# Altium PCB FILLER_PCB.PcbDoc
Units mm, origin at the board's own origin, x right, y up, seen from the top; angles counter-clockwise.
Board outline 71.25 x 41.25 mm, 2 copper layers (Top Layer, Bottom Layer); 48 components, 48 nets, 198 pads, 15 vias.
Unrouted connection lines stored in the file: 64.
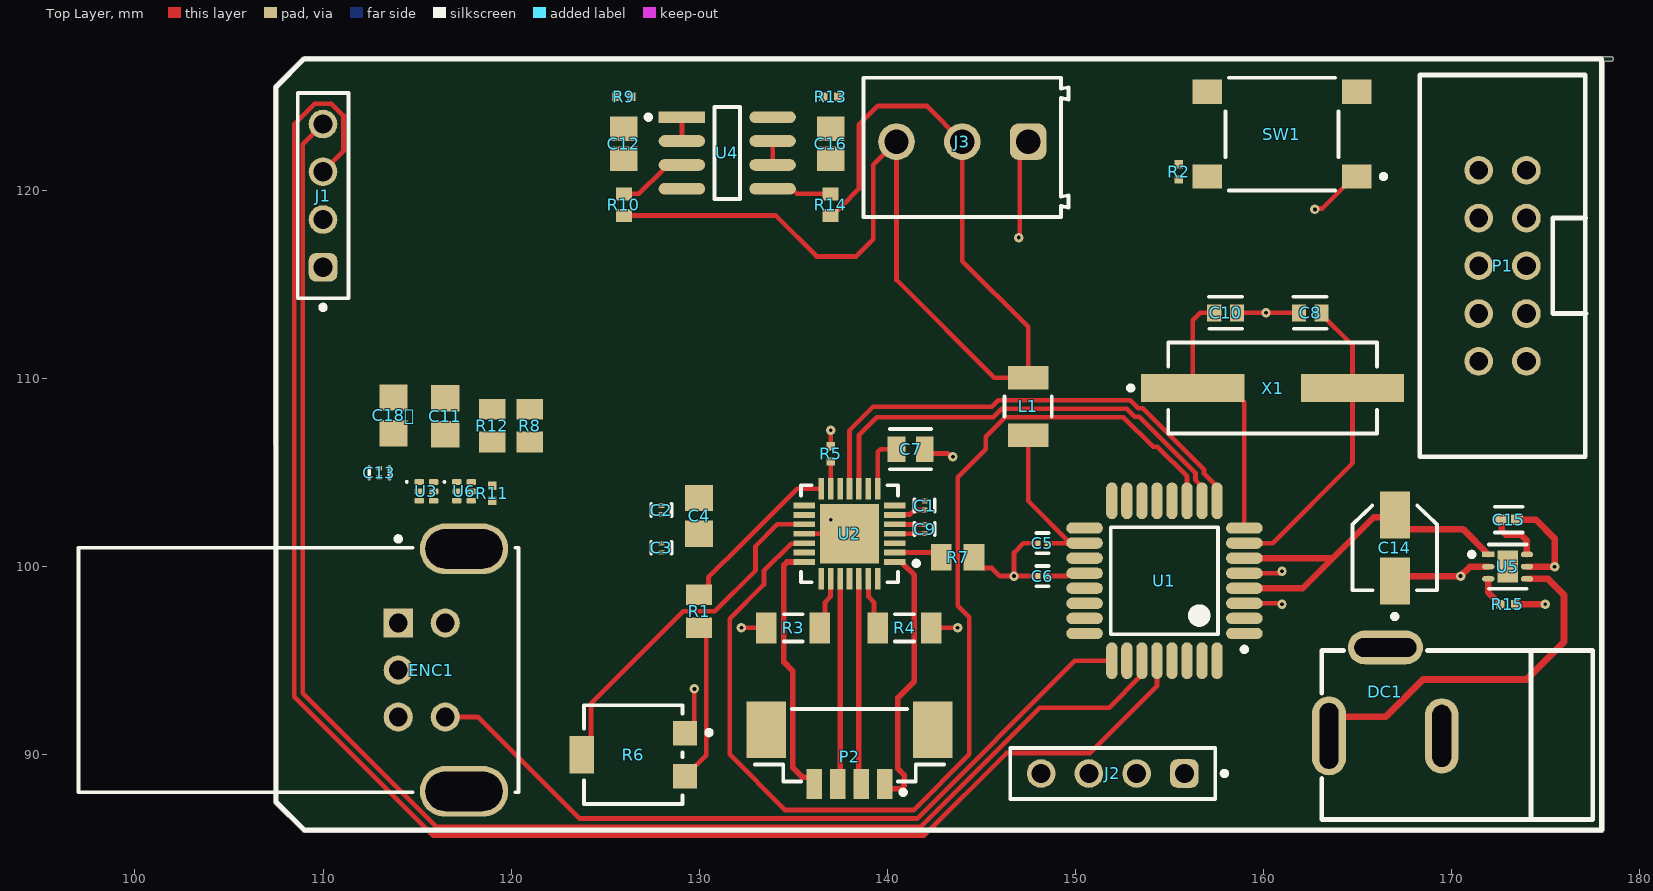
[diagram p0: Top Layer view]
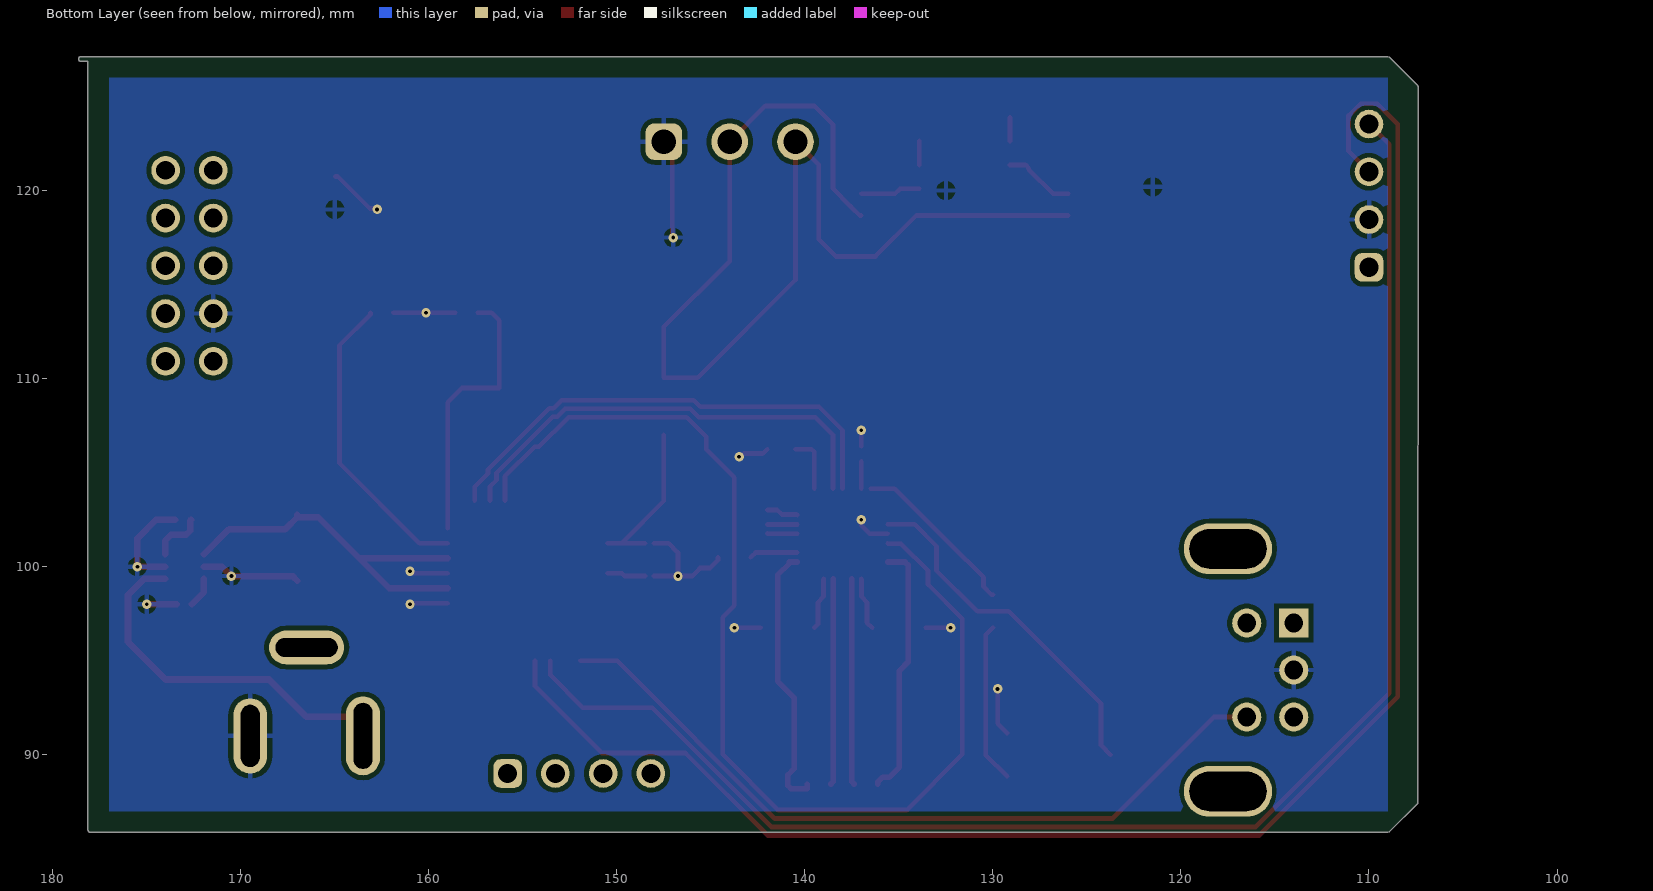
[diagram p1: Bottom Layer view, seen from below]

## Layer stack, top to bottom
Top Solder: solder mask 0.0102, Solder Resist, Dk 3.5
Top Layer: signal copper 0.0356
Dielectric 1: dielectric 0.32, FR-4, Dk 4.8
Bottom Layer: signal copper 0.0356
Bottom Solder: solder mask 0.0102, Solder Resist, Dk 3.5

## Board outline
107.41,87.41 108.91,85.91 109,85.873 178,85.873 ccw(c178,86) 178.127,86 178.127,126.873 178.5,126.873 ccw(c178.5,127) 178.627,127 ccw(c178.5,127) 178.5,127.127 109,127.127 108.91,127.09 107.41,125.59 107.373,125.5

## Design rules (kind name [scope] priority, off if disabled: settings)
Clearance [All] p1: gap=0.25 ignorepadtopadclearanceinfootprint=TRUE except(0: Arc-Hole Track-Hole SMDPad-Hole THPad-Hole Via-Hole Fill-Hole Poly-Hole Region-Hole Text-Hole; 0.2: Arc-Arc Arc-Track Arc-SMDPad Arc-THPad Track-Track Track-SMDPad Track-THPad)
PolygonConnect [All] p1: connectstyle=Relief reliefconductorwidth=0.254 reliefentries=4 polygonreliefangle="90 Angle" airgapwidth=0.254
RoutingVias [All] p1: holewidth=0.2 width=0.5 viastyle="Through Hole" minholewidth=0.2 minwidth=0.5 maxholewidth=0.3 maxwidth=0.7
SolderMaskExpansion [All] p1: expansion=0.102 istentingtop=FALSE
Width [All] p1: maxlimit=1 minlimit=0.25 preferedwidth=0.25 minimp=50.000000 maximp=50.000000 favimp=50.000000
30 further rules are at their usual default settings.

## Components (designator, comment, footprint, x,y, rotation, side; value= is the part's Value field where it differs from the comment)
C1 "0.1uF" FP-GRM033-0_03-MFG 142,103.25 r90 top
C2 "0.1uF" FP-GRM033-0_03-MFG 128,103.012 r90 top
C3 "0.1uF" FP-GRM033-0_03-MFG 128,101 r270 top
C4 "4.7uF" CAPC2013X135X45LL10T25 130,102.7 r270 top
C5 "0.1uF" FP-GRM033-0_03-MFG 148.263,101.25 r180 top
C6 "0.1uF" FP-GRM033-0_03-MFG 148.263,99.5 r180 top
C7 "0.22 uF" FP-C0805C-DN-MFG 141.25,106.25 r180 top value="0.22 μF"
C8 "22pF" FP-C0603C-CF-MFG 162.5,113.5 r180 top value="22 pF"
C9 "0.1uF" FP-GRM033-0_03-MFG 142,102 r90 top
C10 "22pF" FP-C0603C-CF-MFG 158,113.5 r0 top value="22 pF"
C11 "4.7uF" CAPC2013X135X45LL10T25 116.5,108 r90 top
C12 "0.33uF" CAPC2013X140X50NL20T25 126,122.5 r270 top
C13 "0.1uF" FP-GRM033-0_03-MFG 113,105 r90 top
C14 "10uF" FP-FKB-MFG 167,101 r90 top
C15 "1uF" FP-GRM155-0_05-IPC_B 173.071,102.5 r0 top
C16 "0.33uF" CAPC2013X140X50NL20T25 137,122.5 r270 top
C18 "4.7uF" CAPC2013X135X45LL10T25 113.75,108.05 r270 top (schematic designator C18)
DC1 "DC-005-5A-2.5" DC-IN-TH_DC-005-5A-2.5 251.442,90.241 r180 top
ENC1 "PEC12R-2120F-S0012" FP-PEC12R-2120F-S0012-MFG 108.7,94.5 r270 top
J1 "61300411821" 61300411821 110,119.73 r90 top
J2 "61300411821" 61300411821 152,89 r180 top
J3 "691214110003" 691214110003 144,122.3 r180 top
L1 "10uH" BOUR-CM322522_V 147.5,108.525 r270 top
P1 "HDR-IDC-2.54-2X5P" HDR-IDC-2.54-2X5P 172.912,71.052 r90 top
P2 "653104124022" 653104124022 138,90.5 r180 top
R1 "100k Ohm" RESC2013X55X40NL15T20 130,97.625 r270 top
R2 "10k Ohm" RESC1005X40X25LL05T05 155.5,121 r90 top
R3 "0.068 Ohm" RESC3216X70X50NL05T20 135,96.75 r180 top
R4 "0.068 Ohm" RESC3216X70X50NL05T20 140.925,96.75 r0 top
R5 "10k Ohm" RESC1005X40X25LL05T05 137,106 r90 top
R6 "10k Ohm" FP-TS53YL-MFG 126.5,90 r90 top
R7 "100k Ohm" RESC2013X55X40NL15T20 143.75,100.5 r180 top
R8 "100k" RESC2013X55X40NL15T20 121,107.5 r90 top
R9 "10k Ohm" RESC1005X40X25LL05T05 126,125 r0 top
R10 "2.4 M Ohm" RESC1609X50X30LL10T20 126,119.25 r270 top
R11 "10k Ohm" RESC1005X40X25LL05T05 119,103.9 r270 top
R12 "100k" RESC2013X55X40NL15T20 119,107.5 r270 top
R13 "10k Ohm" RESC1005X40X25LL05T05 137,125 r0 top
R14 "2.4 M Ohm" RESC1609X50X30LL10T20 137,119.25 r270 top
R15 "10k Ohm" RESC1005X40X25LL05T05 173,98 r0 top
SW1 "" FP-PTS645SM43SMTR92LFS-MFG 161,123 r180 top
U1 "ATmega328P-AU" 32A_M 154.75,99.25 r180 top
U2 "A4988SETTR-T" FP-ET-28-MFG 138,101.75 r180 top
U3 "SCHMITT" DRY0006A_V 115.5,104 r0 top
U4 "TLV9152IDR" FP-D0008A-IPC_A 131.5,122 r0 top
U5 "TPS7A2650DRVR" FP-DRV0006A-IPC_B 173,100 r0 top
U6 "SN74LVC2G17DRYR" DRY0006A_V 117.5,104 r0 top
X1 "CRYSTAL" CTS-ATS-SM-XTAL-2 160.5,109.5 r0 top

## Footprints (in the part's own frame and the unit in brackets; to place one, negate y for a bottom-side part, rotate by r counter-clockwise, add the part's x,y. Pads: shape width x height; smd on the part's side, far side on the other; paste and mask are expansions set on the pad)
32A_M [mm] "Thin QFP, 32-Leads, Body 7x7mm, Pitch 0.8mm, IPC Low Density"
  oval 1.95x0.6 smd: 1(-4.25,2.8) 2(-4.25,2) 3(-4.25,1.2) 4(-4.25,0.4) 5(-4.25,-0.4) 6(-4.25,-1.2) 7(-4.25,-2) 8(-4.25,-2.8) 17(4.25,-2.8) 18(4.25,-2) 19(4.25,-1.2) 20(4.25,-0.4) 21(4.25,0.4) 22(4.25,1.2) 23(4.25,2) 24(4.25,2.8)
  oval 0.6x1.95 smd: 9(-2.8,-4.25) 10(-2,-4.25) 11(-1.2,-4.25) 12(-0.4,-4.25) 13(0.4,-4.25) 14(1.2,-4.25) 15(2,-4.25) 16(2.8,-4.25) 25(2.8,4.25) 26(2,4.25) 27(1.2,4.25) 28(0.4,4.25) 29(-0.4,4.25) 30(-1.2,4.25) 31(-2,4.25) 32(-2.8,4.25)
  silkscreen extent -4.38,-2.85 2.85,3.77, body extent -3.5,-3.5 3.5,3.5, height 1.2
61300411821 [mm] "Socket Header, Pitch 2.54 mm, THT, Vertical, single row, 4p"
  rrect50% 1.52x1.52 hole 1.02: 1(-3.81,0)
  round 1.52 hole 1.02: 2(-1.27,0) 3(1.27,0) 4(3.81,0)
  silkscreen extent -6.06,-1.35 5.46,1.35, body extent -5.33,-1.25 5.33,1.25, height 8.55
653104124022 [mm] "1.25mm SMT Male Vertical Shrouded Header, 4p"
  rect 0.81x1.6 smd: 1(-1.875,2.07) 2(-0.625,2.07) 3(0.625,2.07) 4(1.875,2.07)
  rect 2.1x3 smd: MP1(-4.425,-0.83) MP2(4.425,-0.83)
  silkscreen extent -5.02,-1.92 5.02,2.62, body extent -4.97,-1.85 4.97,2.35, height 4.74
691214110003 [mm] "3.50 mm Horizontal Entry Modular, 3p"
  rrect50% 1.95x1.95 hole 1.3: 1(-3.5,-0.3)
  round 1.95 hole 1.3: 2(0,-0.3) 3(3.5,-0.3)
  silkscreen extent -5.65,-3.7 5.25,3.7, body extent -5.7,-3.7 5.25,3.7, height 8.55
BOUR-CM322522_V [mm] "Inductor, 2-Leads, Body 3.2x2.5mm, Pitch 3.05mm"
  rect 1.25x2.15 smd: 1(-1.525,0) 2(1.525,0)
  silkscreen extent -0.54,-1.25 0.54,1.25, body extent -1.77,-1.35 1.77,1.35, height 2.4
CAPC2013X135X45LL10T25 [mm] "Chip Capacitor, 2-Leads, Body 2.10x1.35mm, IPC High Density"
  rect 1.4x1.5 smd: 1(-0.95,0) 2(0.95,0)
  body extent -1.05,-0.67 1.05,0.67, height 1.35
CAPC2013X140X50NL20T25 [mm] "Chip Capacitor, 2-Leads, Body 2.00x1.25mm, IPC Medium Density"
  rect 1.3x1.45 smd: 1(-0.8,0) 2(0.8,0)
  body extent -1.1,-0.72 1.1,0.72, height 1.4
CTS-ATS-SM-XTAL-2 [mm] "SMD, 2-Leads, Body 11.1x4.83mm, Pitch 8.5mm"
  rect 5.5x1.5 smd: 1(-4.25,0) 2(4.25,0)
  silkscreen extent -7.67,-2.41 5.55,2.41, body extent -5.59,-2.42 5.59,2.42, height 4.3
DC-IN-TH_DC-005-5A-2.5 [mm]
  oval 1.8x4.2 hole 1 slot 3.5 at 90 deg paste-2539.97 mask+0.051: 1(87.942,-0.759)
  oval 1.8x4 hole 1 slot 3.3 at 90 deg paste-2539.97 mask+0.051: 2(81.942,-0.759)
  oval 4x1.8 hole 1 slot 3.3 at 0 deg paste-2539.97 mask+0.051: 3(84.942,-5.462)
  silkscreen extent 73.91,-5.31 88.32,3.69
DRY0006A_V [mm] "SON, 6-Leads, Body 1.45x1mm, Pitch 0.5mm"
  rrect33% 0.52x0.3 smd paste+0 mask+0.102: 1(-0.385,0.5)
  rrect33% 0.49x0.3 smd paste+0 mask+0.102: 2(-0.385,0) 3(-0.385,-0.5) 4(0.385,-0.5) 5(0.385,0) 6(0.385,0.5)
  silkscreen extent -1.09,0.46 -0.99,0.56, body extent -0.5,-0.72 0.5,0.72, height 0.6
FP-C0603C-CF-MFG [mm]
  rect 0.75x0.9 smd paste+0 mask+0: 1(-0.6,0) 2(0.6,0)
  silkscreen extent -0.87,-0.85 0.88,0.85, body extent -1.2,-0.6 1.2,0.6, height 0.25
FP-C0805C-DN-MFG [mm]
  rect 0.95x1.35 smd paste+0 mask+0: 1(-0.75,0) 2(0.75,0)
  silkscreen extent -1.1,-1.07 1.1,1.07, body extent -1.4,-0.85 1.4,0.85, height 0.25
FP-D0008A-IPC_A [mm]
  rect 2.469x0.622 smd paste+0 mask+0: 1(-2.414,1.905)
  rrect100% 2.469x0.622 smd paste+0 mask+0: 2(-2.414,0.635) 3(-2.414,-0.635) 4(-2.414,-1.905) 5(2.414,-1.905) 6(2.414,-0.635) 7(2.414,0.635) 8(2.414,1.905)
  silkscreen extent -4.32,-2.45 0.68,2.45, body extent -4.15,-2.95 4.15,2.95, height 0.25
FP-DRV0006A-IPC_B [mm]
  rect 0.656x0.292 smd paste+0 mask+0: 1(-1.028,0.65)
  rrect100% 0.656x0.292 smd paste+0 mask+0: 2(-1.028,0) 3(-1.028,-0.65) 4(1.028,-0.65) 5(1.028,0) 6(1.028,0.65)
  rect 1.1x1.7 smd paste-1000 mask+0: 7(0,0)
  silkscreen extent -2.03,-1.17 1,1.17, body extent -1.61,-1.25 1.61,1.25, height 0.25
FP-ET-28-MFG [mm]
  rect 1.15x0.3 smd paste+0 mask+0: 1(-2.4,1.5) 2(-2.4,1) 3(-2.4,0.5) 4(-2.4,0) 5(-2.4,-0.5) 6(-2.4,-1) 7(-2.4,-1.5) 15(2.4,-1.5) 16(2.4,-1) 17(2.4,-0.5) 18(2.4,0) 19(2.4,0.5) 20(2.4,1) 21(2.4,1.5)
  rect 0.3x1.15 smd paste+0 mask+0: 8(-1.5,-2.4) 9(-1,-2.4) 10(-0.5,-2.4) 11(0,-2.4) 12(0.5,-2.4) 13(1,-2.4) 14(1.5,-2.4) 22(1.5,2.4) 23(1,2.4) 24(0.5,2.4) 25(0,2.4) 26(-0.5,2.4) 27(-1,2.4) 28(-1.5,2.4)
  rect 3.15x3.15 smd paste+0 mask+0: 29(0,0)
  silkscreen extent -3.68,-2.58 2.58,2.57
FP-FKB-MFG [mm]
  rect 2.5x1.6 smd paste+0 mask+0: 1(-1.75,0) 2(1.75,0)
  silkscreen extent -3.77,-2.25 2.25,2.25, body extent -3.25,-2.5 3.25,2.5, height 0.25
FP-GRM033-0_03-MFG [mm]
  rect 0.25x0.3 smd paste+0 mask+0: 1(-0.238,0) 2(0.238,0)
  silkscreen extent -0.32,-0.54 0.32,0.54, body extent -0.46,-0.27 0.46,0.27, height 0.25
FP-GRM155-0_05-IPC_B [mm]
  rect 0.615x0.572 smd paste+0 mask+0: 1(-0.429,0) 2(0.429,0)
  silkscreen extent -0.74,-0.69 0.74,0.69, body extent -0.89,-0.44 0.89,0.44, height 0.25
FP-PEC12R-2120F-S0012-MFG [mm]
  round 1.55 hole 1 paste-2539.97 mask+0: 1(-2.5,7.8) 2(2.5,7.8) B(2.5,5.3) C(0,5.3)
  rrect100% 2.7x4.7 hole 4.1 slot 2.1 at 0 deg paste-2539.97 mask+0: 3(-6.45,8.8) 4(6.45,8.8)
  rect 1.55x1.55 hole 1 paste-2539.97 mask+0: A(-2.5,5.3)
  silkscreen extent -7.1,-11.7 6.5,11.7, body extent -7.9,-11.8 7.9,11.8, height 0.25
FP-PTS645SM43SMTR92LFS-MFG [mm]
  rect 1.55x1.3 smd paste+0 mask+0: 1(-3.975,2.25) 2(3.975,2.25) 3(-3.975,-2.25) 4(3.975,-2.25)
  silkscreen extent -5.53,-3 3,3, body extent -4.85,-3.1 4.85,3.1, height 0.25
FP-TS53YL-MFG [mm]
  rect 1.3x1.3 smd paste+0 mask+0: 1(1.15,-2.75) 3(-1.15,-2.75)
  rect 2x1.3 smd paste+0 mask+0: 2(0,2.75)
  silkscreen extent -2.63,-4.15 2.63,2.63, body extent -2.73,-3.5 2.73,3.5, height 0.25
HDR-IDC-2.54-2X5P [mil] "HDR-IDC-2.54-2X5P"
  round 60 hole 39.37 paste-99999 mask+1.97: 1(1569.61,-42.83) 2(1569.61,57.17) 3(1669.61,-42.83) 4(1669.61,57.17) 5(1769.61,-42.83) 6(1769.61,57.17) 7(1869.61,-42.83) 8(1869.61,57.17) 9(1969.61,-42.83) 10(1969.61,57.17)
  silkscreen extent 1370,-168 2169,180
RESC1005X40X25LL05T05 [mm] "Chip Resistor, 2-Leads, Body 1.05x0.55mm, IPC High Density"
  rect 0.45x0.45 smd: 1(-0.4,0) 2(0.4,0)
  body extent -0.53,-0.28 0.53,0.28, height 0.4
RESC1609X50X30LL10T20 [mm] "Chip Resistor, 2-Leads, Body 1.55x0.85mm, IPC High Density"
  rect 0.7x0.85 smd: 1(-0.575,0) 2(0.575,0)
  body extent -0.82,-0.48 0.82,0.48, height 0.5
RESC2013X55X40NL15T20 [mm] "Chip Resistor, 2-Leads, Body 2.00x1.25mm, IPC Medium Density"
  rect 1.1x1.4 smd: 1(-0.875,0) 2(0.875,0)
  body extent -1.07,-0.7 1.08,0.7, height 0.55
RESC3216X70X50NL05T20 [mm] "Chip Resistor, 2-Leads, Body 3.20x1.60mm, IPC Medium Density"
  rect 1.1x1.65 smd: 1(-1.425,0) 2(1.425,0)
  silkscreen extent -0.5,-0.72 0.5,0.72, body extent -1.63,-0.82 1.62,0.82, height 0.7

## Part data
C1 C2 C3 C5 C6 C9 C13: library part CMP-06035-000062-2, "Chip Multilayer Ceramic Capacitors for General Purpose, 0201, 0.10uF, X5R, 15%, 10%, 6.3V", Capacitance=100nF, Case Code (Imperial)=0201, Case Code (Metric)=0603, Dielectric=X5R, Max Operating Temperature=85°C, Min Operating Temperature=-55°C, Package Quantity=1, Tolerance=10%, Voltage=6.3V, Case/Package=0201, Depth=0.3mm, Height=0.3mm, Lead Free="Lead Free", Length=0.6mm, Material=Ceramic, Mount="Surface Mount", Packaging="Tape and Reel", Radiation Hardening=No, REACH SVHC="No SVHC", Termination=SMD/SMT, Thickness=0.013inch, Voltage Rating=6.3V, Voltage Rating (DC)=6.3V, Weight=6E-06oz, Width=0.012inch
C4 C11 C18: library part CMP-1662-00015-2, "Chip Capacitor, 4.7 uF, +/- 10%, 16 V, -55 to 85 degC, 0805 (2012 Metric), RoHS, Tape and Reel", Capacitance="4.7 uF", Case Code (Imperial)=0805, Case Code (Metric)=2012, Max Operating Temperature="85 degC", Min Operating Temperature="-55 degC", Package Quantity=3000, PartNumber=GRM21BR61C475KA88L, Tolerance=10%, Type (Capacitors)=X5R, Voltage Rating="16 V", Case\/Package=0805, ComponentLink1Description="Manufacturer URL", ComponentLink1URL=http://www.murata.com/, ComponentLink2Description=Datasheet, ComponentLink2URL=http://search.murata.co.jp/Ceramy/image/img/A01X/G101/ENG/GRM21BR61C475KA88-01.pdf, DatasheetVersion=03/2016, Height="1.25 mm", Length="2 mm", Mount="Surface Mount", Mounting Technology="Surface Mount", PackageDescription="2-Pin Surface Mount Device, Body 2 x 1.25 mm", PackageReference=0805, Packaging="Tape and Reel", Pins=2, Radiation Hardening=No, REACH SVHC="No SVHC", RoHSCompliant=true, Voltage Rating (DC)="16 V", Width="1.25 mm"
C7: library part CMP-1036-04552-2, "CAP CER 0.22UF 50V X7R 0805", Capacitance="0.22 μF", Manufacturer=KEMET, Manufacturer Part Number=C0805C224K5RACTU, package=C0805C-DN, Temperature="-55°C to +125°C", Temperature Characteristic=X7R, Temperature Coefficient=30ppm/°C, Temperature Range High=+125°C, Temperature Range Low=-55°C, Tolerance=0.1, Voltage Rating="50 V", Automotive=No, Category=Cap, ComponentLink2Description=Datasheet, ComponentLink2URL=https://content.kemet.com/datasheets/KEM_C1003_C0G_SMD.pdf, Device Class L1="Passive Components", Device Class L2=Capacitors, Device Class L3="Ceramic Capacitors", Digikey Description="CAP CER 0.22UF 50V X7R 0805", Height=0.88mm, Ipc Land Pattern Name=CAPC200125X78, Lead Free=Yes, Material=Ceramic, Mouser Description="CAP CER 0.22UF 50V X7R 0805", Octopart=https://octopart.com/c0805c224k5ractu-kemet-144670, RoHS=TRUE
C8 C10: library part CMP-2006-03119-3, "Cap Ceramic 22pF 50V C0G 5% SMD 0603 125°C Paper T/R", Capacitance="22 pF", Manufacturer=KEMET, Manufacturer Part Number=C0603C220J5GACTU, package=C0603C-CF, Temperature="-55°C to +125°C", Temperature Characteristic=C0G, Temperature Coefficient=30ppm/°C, Temperature Range High=+125°C, Temperature Range Low=-55°C, Tolerance=0.05, Voltage Rating="50 V", Automotive=Yes, Automotive Grade="Grade 1", Category=Cap, ComponentLink2Description=Datasheet, ComponentLink2URL=https://api.kemet.com/component-edge/download/datasheet/C0603C100J5GACAUTO.pdf, Device Class L1="Passive Components", Device Class L2=Capacitors, Device Class L3="Ceramic Capacitors", Digikey Description="Cap Ceramic 22pF 50V C0G 5% SMD 0603 125°C Paper T/R", Height=0.87mm, Lead Free=Yes, Material=Ceramic, Mouser Description="Cap Ceramic 22pF 50V C0G 5% SMD 0603 125°C Paper T/R", Octopart=https://octopart.com/c0603c220j5gactu-kemet-98525, RoHS=TRUE
C12 C16: library part CMP-2007-04712-1, Manufacturer="AVX Interconnect / Elco", Part Number=0805YC334JAT2A
C14: library part CMP-05427-000100-1, "CAP ALUM 10UF 20% 16V SMD", Case/Package=Radial, Dielectric Material=Aluminium, ESR (Equivalent Series Resistance)=1.35R, Leakage Current=3uA, Max Operating Temperature=105°C, Min Operating Temperature=-55°C, Package Quantity=2000, Ripple Current=90mA, Tolerance=20%, Voltage=16V, Capacitance=10uF, Construction=Cylindrical, Contact Plating=Tin, Diameter=4mm, Height=5.8mm, Height - Seated (Max)=0.24inch, Impedance=1.35R, Lead Free="Lead Free", Length=5.8mm, Life (Hours)=2000Hour, Mount="Surface Mount", Number of Pins=2, Packaging="Tape and Reel", Polarity=Polar, Radiation Hardening=No, REACH SVHC="No SVHC", Ripple Current (AC)=90mA, RoHS Compliant=Yes, series=FK, Termination=SMD/SMT, Voltage Rating=16V, Voltage Rating (DC)=16V, Width=5.5mm
C15: library part CMP-2008-04581-2, "Chip Multilayer Ceramic Capacitors for General Purpose, 0402, 1.0uF, X5R, 15%, 10%, 25V", Case Code (Imperial)=0402, Case Code (Metric)=1005, Dielectric=X5R, Max Operating Temperature=85°C, Min Operating Temperature=-55°C, Package Quantity=10000, Tolerance=10%, Voltage=25V, Capacitance=1uF, Case/Package=0402, Depth=0.5mm, Height=0.5mm, Lead Free="Lead Free", Length=1mm, Material=Ceramic, Mount="Surface Mount", Packaging="Tape and Reel", REACH SVHC="No SVHC", Termination=SMD/SMT, Thickness=0.022inch, Voltage Rating=25V, Voltage Rating (DC)=25V, Weight=0.000212oz, Width=0.5mm
DC1: library part DC-005-5A-2.5_1, "DC Power Receptacle 260℃ Brass -20℃~+70℃ 2.5mm 6.5mm 5A 24V Plugin DC Power Connectors ROHS", Current Rating (Max)=5A, JLCPCB Part Class="Extended Part", LCSC Part Name="DC电源插座 内径:2.5mm 外径:6.5mm", Manufacturer="XKB Connectivity(中国星坤)", Operating Temperature Range=-20℃~+70℃, Soldering Temperature(Max)=260℃, Supplier Part Number 1=C381115, Voltage Rating (Max)=24V, Add into BOM=yes, Connector Type="DC Power Receptacle", Contact Material=Brass, Convert to PCB=yes, Datasheet=https://atta.szlcsc.com/upload/public/pdf/source/20220930/9F6B678D272419D8FE16D336E354A545.pdf, Device=DC-005-5A-2.5, Inside Contact Diameter=2.5mm, Manufacturer Part=DC-005-5A-2.5, Outside Contact Diameter=6.5mm, Supplier=LCSC, Supplier 1=LCSC, Supplier Footprint=插件, Supplier Part=C381115, Symbol=DC-005-5A-2.5
ENC1: library part CMP-07421-000025-1, "ROTARY ENCODER MECHANICAL 12PPR", Max Operating Temperature=70°C, Min Operating Temperature=-30°C, Package Quantity=75, Built in Switch=Yes, Detent=Yes, Encoder Type=Mechanical, Height=13.4mm, Hole Diameter=2.1mm, Length=26mm, Mount="Through Hole", Number of Channels=2, Orientation="Right Angle", Output Type=Quadrature, Packaging=Bulk, Pulses per Revolution=12, RoHS Compliant=Yes, series=PEC12R, Termination="PC Pin", Width=12.5mm
J1 J2: library part CMP-1502-01316-3, Contact Resistance=20mΩ, Current Rating=3A, Operating Supply Voltage=250V, Gender=Female, Lead Pitch=2.54mm, NexarPartId=61924712, Number of Pins=4, Orientation=Vertical, RoHS=Non-Compliant
J3: library part CMP-1502-02466-2, Color="Blue, Green", Current=10A, Max Operating Temperature=105°C, Min Operating Temperature=-40°C, Voltage=300V, Contact Material=Brass, Contact Plating="Brass, Tin", Current Rating=10A, Height=12.2mm, Housing Material=Nylon, Lead Pitch=3.5mm, Length=7.4mm, Mount="Through Hole", NexarPartId=18818289, Number of Contacts=3, Number of Levels=1, Number of Pins=3, Number of Positions Per Level=3, Packaging=Box, Pitch=3.5052mm, Plating="Brass, Steel", REACH SVHC=Unknown, RoHS=Compliant, Stripping Length=-6mm, Termination=Screw, Voltage Rating=300V, Width=10.9mm, Wire Gauge (Max)=24AWG, Wire Gauge (Min)=16AWG, Wire/Cable Gauge=24AWG
L1: library part CMP-1747-00008-1, "Chip Inductor / , 10 uH, +/- 10%, -40 to 125 degC, 1210 (3225 Metric), RoHS, Tape and Reel", Colour=White, Current Rating="1.5 A", Max Operating Temperature="85 degC", Min Operating Temperature="-55 degC", Package Quantity=100, ComponentLink1Description="Manufacturer URL", ComponentLink1URL=http://www.bourns.com/, ComponentLink2Description=Datasheet, ComponentLink2URL=http://www.bourns.com/docs/Product-Datasheets/cm322522.pdf, Connector Type=USB, Contact Material=Bronze, Contact Plating=Gold, DatasheetVersion=Aug-14, Gender=Female, Height="15.9 mm", Lead Pitch="2.5 mm", Mount="Through Hole", PackageDescription="2-Pin Surface Mount Device, Body 3.2 x 2.5 mm", PackageReference=1210, Packaging=Tray, Pins=4, Radiation Hardening=No, RoHSCompliant=true, Width="11.15 mm"
P1: JLCPCB Part Class="Extended Part", Manufacturer=BOOMELE(博穆精密), Manufacturer Part=2.54-2*5P简牛, spicePre=P, spiceSymbolName=HDR-IDC-2.54-2X5P, Supplier=LCSC, Supplier Part=C5665
P2: library part CMP-1502-00759-2, Color="Beige, White", Contact Resistance=20mΩ, Current Rating=1A, Flammability Rating="UL94 V-0", Insulation Resistance=100MΩ, Max Operating Temperature=85°C, Min Operating Temperature=-40°C, Operating Supply Voltage=125V, Connector Type="Male Pin", Contact Gender=Male, Contact Material=Copper, Contact Mating Length=2.159mm, Contact Plating=Tin, Gender=Male, Height=4.75mm, Housing Material=Nylon, Insulation=Insulated, Lead Pitch=1.25mm, Length=9.75mm, Mount="Surface Mount", NexarPartId=18818277, Number of Contacts=4, Number of Pins=4, Number of Positions=4, Number of Rows=1, Orientation=Vertical, Packaging="Tape and Reel", Pitch=1.25mm, REACH SVHC=Unknown, RoHS=Compliant, Termination=SMD/SMT, Voltage Rating=125V, Width=9.75mm
R1 R7 R8 R12: library part CMP-2001-04708-1, Manufacturer="Vishay Dale", Part Number=TNPW0805100KDEEA
R2 R5 R9 R11 R13 R15: library part CMP-2000-07588-1, "Chip Resistor, 10 KOhm, +/- 1%, 0.1 W, -55 to 155 degC, 0402 (1005 Metric), RoHS, Tape and Reel", Case Code (Imperial)=0402, Case Code (Metric)=1005, Manufacturer=Panasonic, Max Operating Temperature=155degC, Max Power Dissipation=100mW, Min Operating Temperature=-55degC, Package Description="2-Pin Surface Mount Device, Body 1 x 0.5 mm", Package Quantity=1, Package Reference=402, Resistance=10KOhm, Temperature Coefficient=100ppm\/degreesC, Tolerance=1%, Voltage Rating=50V, Case\/Package=0402, Composition=ThickFilm, Contact Plating=Tin, Datasheet URL=https://industrial.panasonic.com/cdbs/www-data/pdf/RDA0000/AOA0000C304.pdf, Datasheet Version=02/2017, Depth=0.5mm, Height=0.35mm, Lead Free=LeadFree, Length=1mm, Manufacturer URL=http://www.panasonic.com/, Military Standard=Not, Mount=SurfaceMount, Mounting Technology=SurfaceMount, Number of Pins=2, Number of Terminations=2, Packaging=TapeandReel, Power Rating=100mW, Radiation Hardening=No, REACH SVHC=NoSVHC, RoHSCompliant=True, Termination=SMD/SMT, Voltage Rating (DC)=50V, Width=0.02inch
R3 R4: library part CMP-2003-00782-1, Manufacturer=Panasonic, Part Number=ERJ8BWFR068V
R6: library part CMP-02410-000004-1, "TRIMMER 10K OHM 0.25W GW TOP ADJ", Max Operating Temperature=125°C, Max Power Dissipation=250mW, Min Operating Temperature=-55°C, Package Quantity=1, Resistance=10kR, Resistance Tolerance=20%, Resistor Type=Cermet, Temperature Coefficient=100ppm/°C, Depth=6.4mm, Height=2.7mm, Lead Free="Lead Free", Length=5mm, Military Standard=Not, Mount="Surface Mount", Number of Turns=1, Packaging="Tape and Reel", Power Rating=250mW, Radiation Hardening=No, RoHS Compliant=Yes, series=TS53Y, Taper=Linear, Technology=CERMET, Termination="Gull Wing", Tolerance=20%, Width=5mm
R10 R14: library part CMP-1012-00890-2, Manufacturer="Vishay Dale", Part Number=CRCW06032M40FKEA
SW1: library part CMP-2000-05160-2, "SWITCH TACTILE SPST-NO 0.05A 12V", Case/Package=SMD/SMT, Color=Black, Contact Resistance=100mR, Current Rating=50mA, Max Operating Temperature=60°C, Max Voltage Rating (DC)=12V, Min Operating Temperature=-20°C, Operating Force=160gf, Package Quantity=1, Actuator Length=0.85mm, Actuator Material=Nylon, Actuator Type=Standard, Contact Material=Silver, Contact Plating=Silver, Depth=9mm, Illumination Type=Non-Illuminated, Lead Free="Lead Free", Length=6mm, Max Current Rating=50mA, Mechanical Life=100000Cycles, Mount="Surface Mount", Orientation=Straight, Packaging="Tape and Reel", REACH SVHC="No SVHC", Switch Function=Off-Mom, Termination="Gull Wing", Throw Configuration=SPST, Voltage Rating (DC)=12V
U1: library part CMP-0095-00269-2, "8-bit AVR Microcontroller, 32KB Flash, 1KB EEPROM, 2KB SRAM, 32-pin TQFP, Industrial Grade (-40°C to 85°C)", Code_JEDEC=MS-026-ABA, ComponentLink1Description="Manufacturer URL", ComponentLink1URL=http://www.atmel.com/, ComponentLink2Description="ATmega48A/48PA/88A/88PA/168A/168PA/328/328P Datasheet", ComponentLink2URL=http://www.atmel.com/dyn/resources/prod_documents/doc8271.pdf, ComponentLink3Description="ATmega48A/48PA/88A/88PA/168A/168PA/328/328P Summary", ComponentLink3URL=http://www.atmel.com/dyn/resources/prod_documents/8271S.pdf, DatasheetVersion="revD, May-2011", PackageDescription="32-Lead, 7x7x1.0 mm Body, 0.8mm Lead Pitch, Thin Profile Plastic Quad Flat Package (TQFP)", PackageReference=32A, PackageVersion="revC, Oct-2010", RevisionNote="DatasheetVersion & PackageVersion updated. URLs added."
U2: library part CMP-1742-00003-2, "IC MTR DRVR BIPOLAR 3-5.5V 28QFN", Case/Package="QFN EP", Max Operating Temperature=85°C, Max Supply Voltage=35V, Min Operating Temperature=-20°C, Min Supply Voltage=8V, Output Current=2A, Package Quantity=1, Motor Type=Stepper, Mount="Surface Mount", Number of Outputs=1, Number of Pins=28, Output Voltage=35V, Packaging="Tape and Reel", Radiation Hardening=No, REACH SVHC="No SVHC"
U3 U6: library part CMP-0859-00864-4, "Dual Schmitt-Trigger Buffer, DRY0006A, LARGE T&R", F @ Nom Voltage(Max)(Mhz)=150, Generic Part Number=SN74LVC2G17, ICC @ Nom Voltage(Max)(mA)=0.01, Manufacturer="Texas Instruments", Operating Temperature Range(C)="-40 to 125,-40 to 85", Rating=Catalog, tpd @ Nom Voltage(Max)(ns)=9.3,5.7,5.4,4.3, Voltage(Nom)(V)=1.8,2.5,3.3,5, 3-State Output=No, Bits(#)=2, DatasheetVersion=SCES381N, Input Type=CMOS/TTL, Logic=True, Output Drive (IOL/IOH)(Max)(mA)=32/-32, Output Type=CMOS, PackageReference=DRY0006A, Schmitt Trigger=Yes, Sub-Family="Non-Inverting Buffer/Driver", Technology Family=LVC, VCC(Max)(V)=5.5, VCC(Min)(V)=1.65
U4: library part CMP-04895-000148-1, "IC OPAMP GP 2 CIRCUIT 8SOIC"
U5: library part CMP-04917-000326-1, "IC REG LINEAR 5V 500MA 6WSON"
X1: library part CMP-0585-00002-2, "ATS-SM Series Quartz Crystal, 16 MHz, -20 to 70 degC, 11.1 x 4.83 x 4.3mm SMD, RoHS, Tape and Reel", Frequency="16 MHz", Manufacturer="CTS Corporation", Operating Temperature="-20 to 70 degC", PartNumber=ATS16ASM-1, Shunt Capacitance (C0)="7.0 pF Max", ComponentLink1Description="Manufacturer URL", ComponentLink1URL=http://www.ctscorp.com/, ComponentLink2Description=Datasheet, ComponentLink2URL=http://www.ctscorp.com/components/Datasheets/008-0309-0.pdf, ComponentLink3Description="Package Specification", ComponentLink3URL=http://www.ctscorp.com/components/Datasheets/008-0309-0.pdf, Crystal Cut=AT-Cut, DatasheetVersion="Rev. K", Drive Level (Type)="100 uW", ESR Maximum="40 Ohms", Mounting Technology="Surface Mount", Oscillation Mode="Fundamental or 3rd Overtone", PackageDescription="2-Pin SMD, Body 11.1 x 4.83 mm, Pitch 8.5 mm", PackageReference=ATS-SM-XTAL-2, Packing="Tape and Reel", RoHS=TRUE

## Via types
v1: diameter 0.5, hole 0.2, Top Layer to Bottom Layer, 15 vias

## Nets (pads, with @x,y where several pads share a name; then routed paths per layer and width w, separated by ;. In a path a pad name is that pad's centre, name@x,y a point inside that pad or via, vN(x,y) a via of type N, cw(c..) or ccw(c..) an arc to the next point about the centre after c; other vN are vias at no path point)
+12: C1.2 C2.1 C3.1 C4.2 C15.1 DC1.1 U2.22 U2.28 U5.4 U5.6 | length 23.8
  Top Layer w0.35: DC1.1@162.83,89.975 163.5,90.645 DC1.1 163.5,91.355 164.17,92.025 166.525,92.025 168.5,94 174,94 176,96 176,98.5 175.15,99.35 U5.4 ; C15.1 172.692,102.451 172.692,101.912 172.897,101.707 173.699,101.707 174.028,101.379 U5.6
A0: U1.23 U4.1 U4.2 | length 1.3
  Top Layer w0.25: U4.2 U4.1
A1: U1.24 U4.6 U4.7 | length 1.3
  Top Layer w0.25: U4.6 U4.7
ADC3: J2.2 U1.26
ADC6: J2.3 U1.19
ADC7: J2.4 U1.22
AVCC: C5.1 L1.2 P1.2 U1.18 | length 8.7
  Top Layer w0.25: L1.2 147.5,103.491 U1.18@149.741,101.25 ; C5.1 U1.18@149.741,101.25 ; U1.18 U1.18@149.741,101.25
DIR: U1.11 U2.19 | length 60
  Top Layer w0.25: U2.19 135.575,101.225 134.89,101.225 133.45,99.785 133.45,99.05 131.625,97.225 131.625,90.02 134.59,87.055 141.41,87.055 144.375,90.02 144.375,97.301 143.75,97.926 143.75,104.75 145.25,106.25 145.25,106.91 146.29,107.95 152.568,107.95 154.143,106.375 154.375,106.375 155.95,104.8 U1.11
EN: R7.2 U1.13 U2.2 | length 2.6
  Top Layer w0.25: U2.2 141.275,100.75 142.625,100.75 R7.2
ENCA: U1.32 U3.6
ENCB: U1.14 U3.4
ENCSW: C13.2 ENC1.2 R11.1 U1.25 | length 41.2
  Top Layer w0.25: ENC1.2 118.25,92 123.645,86.605 141.596,86.605 149.991,95 U1.25
GND: C2.2 C3.2 C4.1 C5.2 C6.2 C7.1 C8.2 C10.2 C11.2 C12.2 C14.1 C15.2 C16.2 C18.1 DC1.2 ENC1.C J1.2 J3.1 P1.4 R3.2 R4.2 R5.2 R6.1 R7.1 R11.2 R15.2 SW1.1 U1.3 U1.5 U1.21 U2.3 U2.18 U2.29 U4.4 U5.2 U5.5 U5.7 U6.2 | length 44.2
  Top Layer w0.25: R6.1 129.75,91.65 v1(129.75,93.5) ; v1(132.25,96.75) R3.2 ; U2.18 136.55,101.75 137,102.2 v1(137,102.5) ; R5.2 v1(137,107.25) ; C7.1 142.235,106.015 143.257,106.015 143.432,105.84 v1(143.5,105.84) ; R4.2 v1(143.75,96.75) ; R7.1 144.625,100.35 145.05,99.925 145.575,99.925 146,99.5 v1(146.75,99.5) ; v1(147,117.5) 147.048,117.548 147.048,122.148 J3.1 ; C6.2 v1(146.75,99.5) ; C5.2 147.25,101.25 146.75,100.75 v1(146.75,99.5) ; C10.2 v1(160.15,113.5) C8.2 ; U1.3 160.95,98.05 v1(161,98) ; U1.5 160.9,99.65 v1(161,99.75) ; v1(162.75,119) 162.798,119.048 163.148,119.048 164.85,120.75 SW1.1
  Top Layer w0.35: C14.1 167.25,99.5 v1(170.5,99.5) 171,100 U5.2 ; R15.2 v1(175,98) ; C15.2 174.5,102.5 175.5,101.5 v1(175.5,100) U5.5
MISO: P1.9 U1.16
MOSI: P1.1 U1.15
MS1: U1.2 U2.9
MS2: U1.10 U2.10 | length 24.4
  Top Layer w0.25: U2.10 138.5,107 139.45,107.95 145.654,107.95 146.104,108.4 152.754,108.4 153.179,107.975 153.411,107.975 156.4,104.986 156.4,104.609 156.75,104.259 U1.10
MS3: U1.9 U2.11 | length 26.1
  Top Layer w0.25: U2.11 138,107.25 139.25,108.5 145.568,108.5 145.918,108.85 152.94,108.85 153.365,108.425 153.598,108.425 156.85,105.173 156.85,104.959 157.55,104.259 U1.9
NetC1_1: C1.1 U2.6 | length 1.7
  Top Layer w0.25: U2.6 140.425,102.775 141.238,102.775 141.475,103.012 C1.1
NetC6_1: C6.1 U1.20 | length 2.1
  Top Layer w0.25: C6.1 149.58,99.5 149.73,99.65 U1.20
NetC7_2: C7.2 U2.8 | length 3
  Top Layer w0.25: U2.8 139.5,106.1 139.65,106.25 C7.2
NetC8_1: C8.1 U1.7 X1.2 | length 16.2
  Top Layer w0.25: U1.7 160.5,101.25 164.75,105.5 X1.2 164.75,111.775 163.1,113.425 C8.1
NetC9_1: C9.1 U2.4 | length 1.6
  Top Layer w0.25: U2.4 141.963,101.75 141.975,101.762 C9.1
NetC9_2: C9.2 U2.5 | length 1.6
  Top Layer w0.25: U2.5 140.413,102.237 C9.2
NetC10_1: C10.1 U1.8 X1.1 | length 14.7
  Top Layer w0.25: C10.1 156.65,113.5 156.25,113.1 X1.1 158.25,109.5 159,108.75 U1.8
NetC11_1: C11.1 ENC1.A R8.1 U3.1
NetC12_1: C12.1 R9.2
NetC16_1: C16.1 R13.2
NetC18_2: C18.2 ENC1.B R12.2 U3.3
NetP2_1: P2.1 U2.1 | length 14.4
  Top Layer w0.3: P2.1 139.875,88.18 140.73,88.18 140.906,88.356 140.906,88.918 140.575,89.249 140.575,93.03 141.45,93.905 141.45,99.55 140.825,100.175 140.825,100.25 U2.1
NetP2_2: P2.2 U2.26 | length 11
  Top Layer w0.3: U2.26 138.5,88.555 P2.2
NetP2_3: P2.3 U2.24 | length 11
  Top Layer w0.3: P2.3 137.5,88.555 U2.24
NetP2_4: P2.4 U2.21 | length 13.7
  Top Layer w0.3: U2.21 134.676,100.25 134.5,100.074 134.5,94.94 134.975,94.465 134.975,89.33 135.504,88.801 135.87,88.801 136.125,88.546 P2.4
NetR3_1: R3.1 U2.23 | length 2.8
  Top Layer w0.25: R3.1 136.7,97.025 136.7,98.113 136.988,98.4 136.988,99.338 U2.23
NetR4_1: R4.1 U2.27 | length 2.8
  Top Layer w0.25: U2.27 139.013,99.338 139.013,98.4 139.3,98.113 139.3,96.95 R4.1
NetR6_2: R6.2 U2.17 | length 19
  Top Layer w0.25: R6.2 124.25,90.5 124.25,92.71 129.165,97.625 130.835,97.625 133,99.79 133,101.085 134.165,102.25 U2.17
NetR9_1: R9.1 R10.1 U4.3 | length 3.8
  Top Layer w0.25: R10.1 126.8,119.825 128.092,121.117 128.092,121.193 128.264,121.365 U4.3
NetR13_1: R13.1 R14.1 U4.5 | length 3.2
  Top Layer w0.25: U4.5 134.938,120.095 135.208,119.825 R14.1
NetR15_1: R15.1 U5.3 | length 1.6
  Top Layer w0.35: U5.3 171.972,98.628 R15.1
PD3: J2.1 U1.1
RESET: U1.12 U2.12
RST: P1.5 R2.1 SW1.3 U1.29
SCK: P1.7 U1.17
SCL: J1.3 U1.28 | length 90.8
  Top Layer w0.25: J1.3 111.085,122.085 111.085,123.989 110.449,124.625 109.551,124.625 108.465,123.539 108.465,93.08 115.84,85.705 141.969,85.705 146.349,90.085 150.785,90.085 154.35,93.65 U1.28
SDA: J1.4 U1.27 | length 82.4
  Top Layer w0.25: J1.4 108.915,122.455 108.915,93.266 116.026,86.155 141.782,86.155 148.127,92.5 151.809,92.5 153.55,94.241 U1.27
SLP: R1.1 U1.31 U2.14 | length 9.1
  Top Layer w0.25: R1.1 130.075,98.5 130.5,98.925 130.5,99.425 132.35,101.275 135.225,104.15 U2.14
STP: U1.30 U2.16
VCC: C13.1 C14.2 ENC1.1 J1.1 J3.2 J3.3 L1.1 R1.2 R2.2 R5.1 R6.3 R8.2 R10.2 R12.1 R14.2 U1.4 U1.6 U2.13 U2.15 U4.8 U5.1 U6.5 | length 93
  Top Layer w0.25: R10.2 134.075,118.675 136.25,116.5 138.354,116.5 139.264,117.411 139.264,121.364 J3.3 140.5,115.25 145.7,110.05 L1.1 147.5,112.75 144,116.25 J3.2 142.1,124.5 139.5,124.5 138.5,123.5 138.5,120.09 137.56,119.15 137.55,119.15 137.075,118.675 R14.2 ; R6.3 130.375,89.975 130.375,96.375 R1.2 ; U2.13 R5.1
  Top Layer w0.35: U1.4 162.1,98.85 163.7,100.45 ; U1.6 163.7,100.45 ; C14.2@167,102.625 167.625,102 170.622,102 U5.1 ; C14.2 166.88,102.63 165.88,102.63 163.7,100.45
pads on no net: DC1.3 ENC1.3 ENC1.4 P1.3 P1.6 P1.8 P1.10 P2.MP1 P2.MP2 SW1.2 SW1.4 U2.7 U2.20 U2.25 U3.2 U3.5 U6.1 U6.3 U6.4 U6.6

## Polygon pours and split planes (outlines as drawn)
GND on Bottom Layer "GND" (solid, pour order 0): 109,126 177,126 177,87 109,87

## Silkscreen, mask and mechanical layers (free items; w line width, h text height)
Top Overlay:
  lines w0.254: 107.5,87.5 109,86 178,86 178,127 109,127 107.5,125.5 107.5,87.5